# EAGLE board Motherboard_2 (EAGLE 9.2.0)
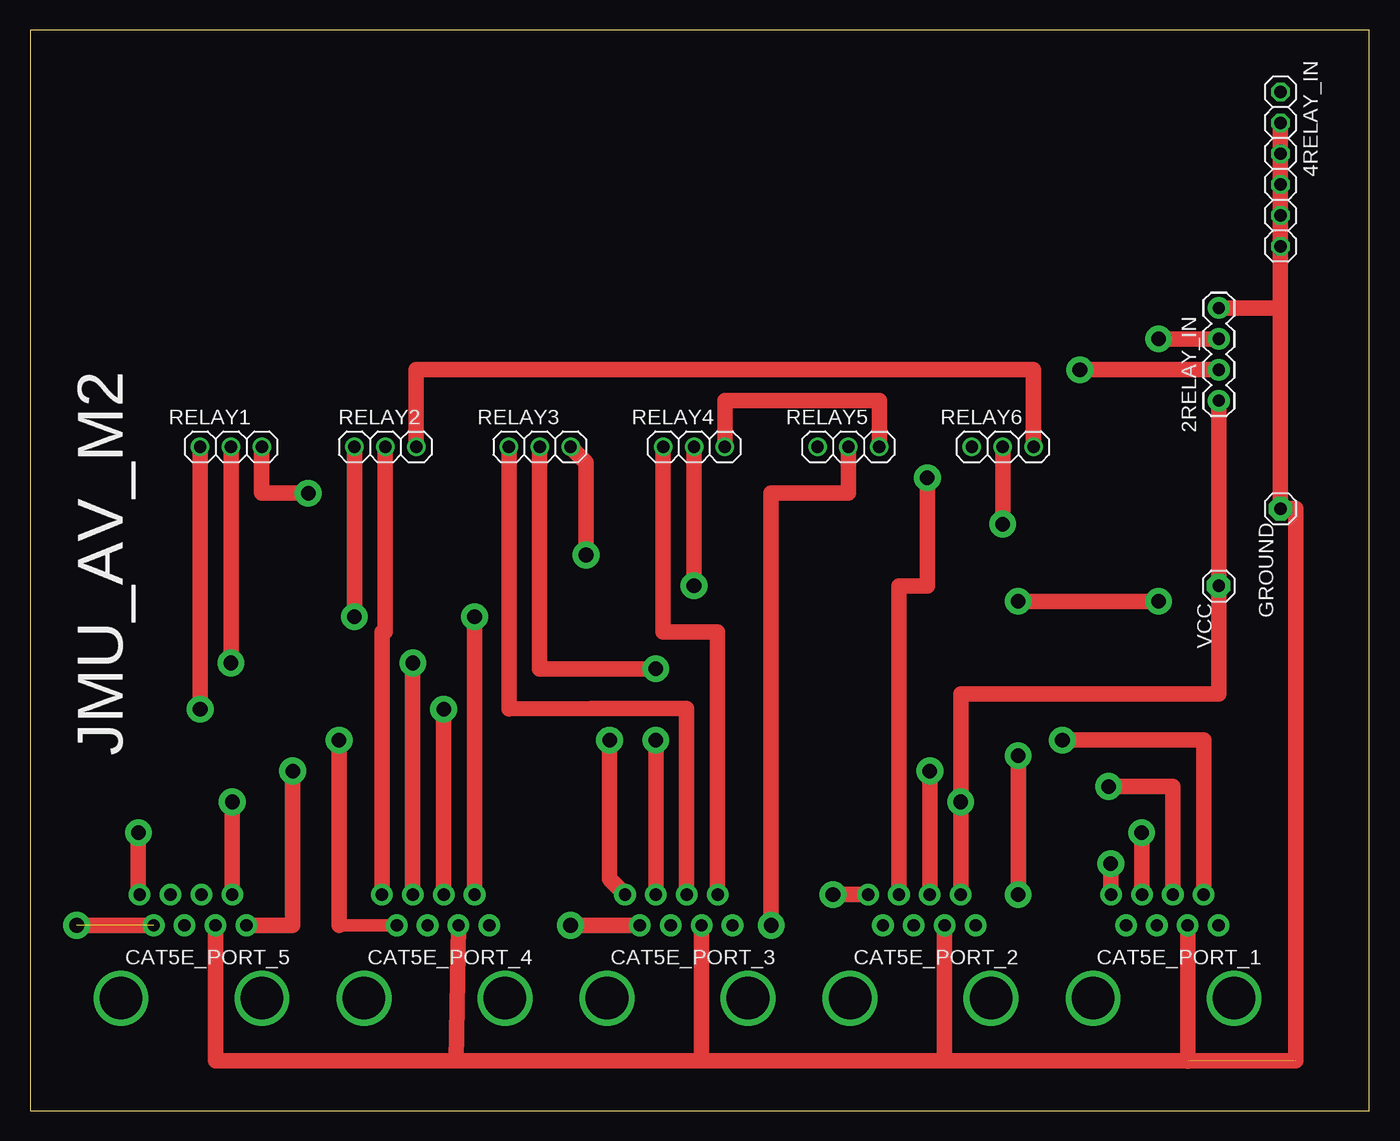
[diagram p0: board, top side]
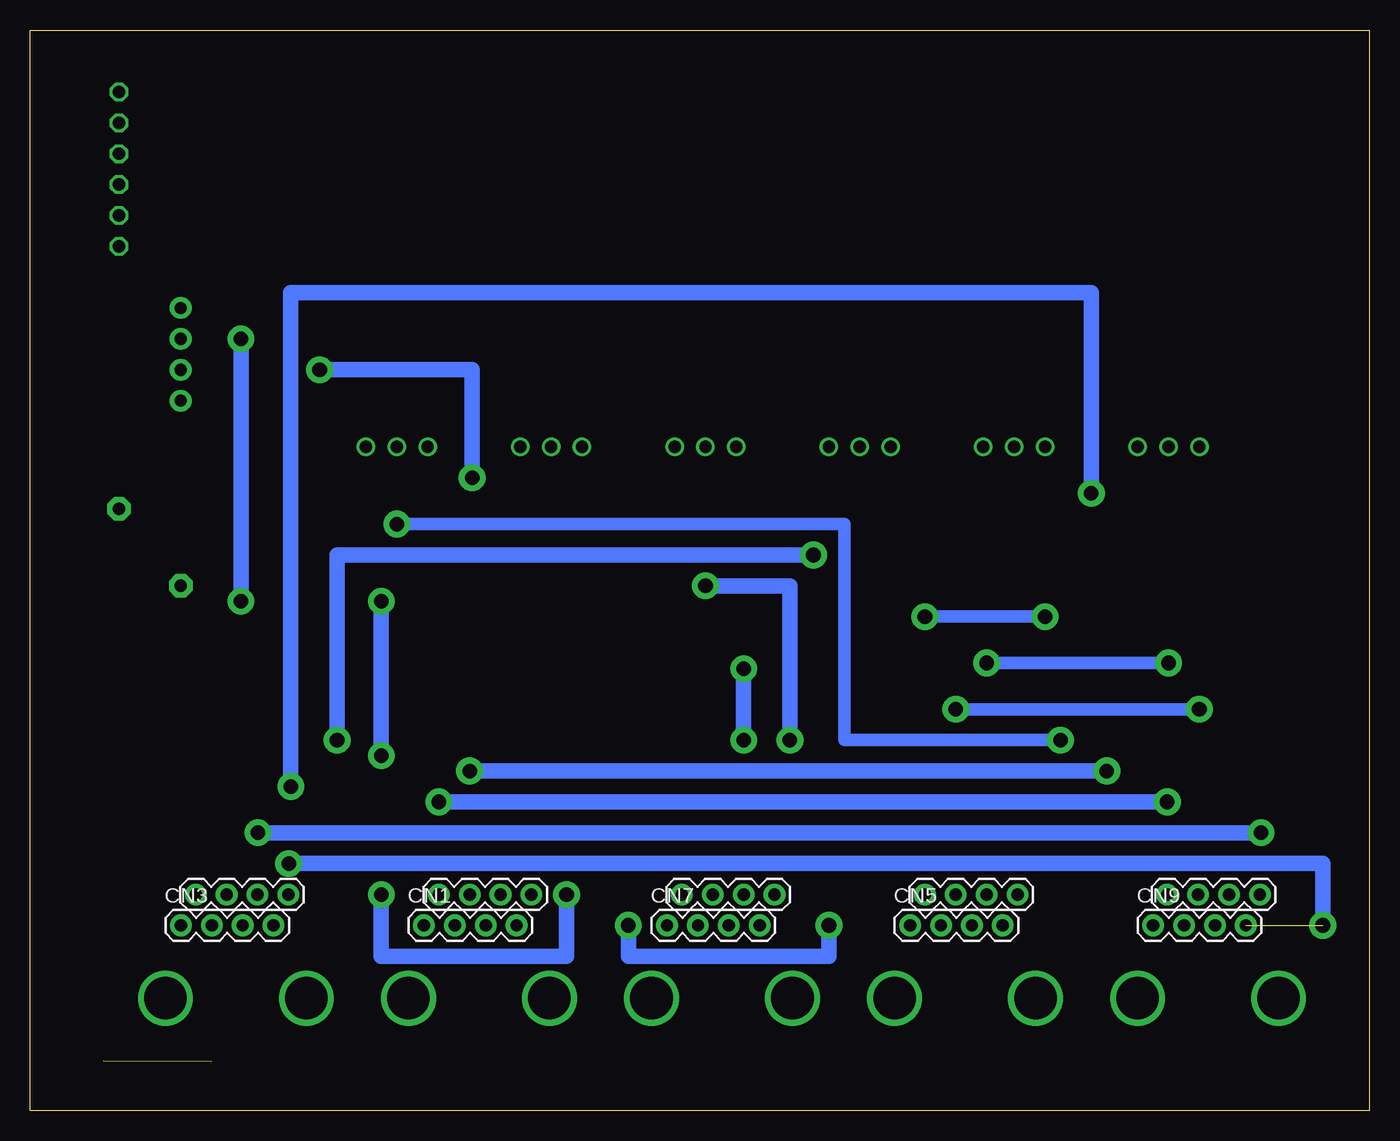
[diagram p1: board, bottom side, seen from below]

Size 110.16 x 88.89 mm. Coordinates in mm from the lower left corner, seen from the top.
Outline: 0,0 110.16,0 110.16,88.89 0,88.89 0,0
Copper layers (1*16): Top 0.035mm / dielectric 1.5mm / Bottom 0.035mm
Design rules "default": minimum track width 6mil, minimum drill 0.35mm, track to track 6mil, track to pad 6mil, pad to pad 6mil, via to via 6mil, smd to smd 6mil, copper to edge 40mil, drill to drill 6mil, minimum pad ring 10mil, minimum via ring 8mil, stop-mask expansion 4mil, vias tented up to drill 0mil, thermal gap 10mil
Net classes: 0 default: width 0.762 mm, drill 0.254 mm, clearance 0.025 mm

## Footprints (pad centres in the part's own frame; a part is rotated, then mirrored left to right if it is on the bottom)
1X04-BIG = drill 1.016 pad 1.778: 1 0,0; 2 2.54,0; 3 5.08,0; 4 7.62,0
1X06 = drill 1.016 octagon: 1 -6.35,0; 2 -3.81,0; 3 -1.27,0; 4 1.27,0; 5 3.81,0; 6 6.35,0
1X01 = drill 1.016 pad 1.93 octagon: 1 0,0
1X03 = drill 1.016: 1 -2.54,0; 2 0,0; 3 2.54,0

## Placement (x,y rotation side)
2RELAY_IN  1X4-BIG  [1X04-BIG]  97.79,58.42 90 top
4RELAY_IN  [1X06]  102.87,77.47 270 top
CAT5E_PORT_1  1X4-BIG  [1X04-BIG]  96.55,17.78 0 bottom
CAT5E_PORT_2  1X4-BIG  [1X04-BIG]  76.55,17.78 0 bottom
CAT5E_PORT_3  1X4-BIG  [1X04-BIG]  56.55,17.78 0 bottom
CAT5E_PORT_4  1X4-BIG  [1X04-BIG]  36.55,17.78 0 bottom
CAT5E_PORT_5  1X4-BIG  [1X04-BIG]  16.61,17.78 0 bottom
CN1  1X4-BIG  [1X04-BIG]  77.77,15.24 0 bottom
CN3  1X4-BIG  [1X04-BIG]  97.77,15.24 0 bottom
CN5  1X4-BIG  [1X04-BIG]  37.77,15.24 0 bottom
CN7  1X4-BIG  [1X04-BIG]  57.77,15.24 0 bottom
CN9  1X4-BIG  [1X04-BIG]  17.77,15.24 0 bottom
GROUND  [1X01]  102.87,49.53 90 top
RELAY1  [1X03]  16.51,54.61 0 top
RELAY2  [1X03]  29.21,54.61 0 top
RELAY3  [1X03]  41.91,54.61 0 top
RELAY4  [1X03]  54.61,54.61 0 top
RELAY5  [1X03]  67.31,54.61 0 top
RELAY6  [1X03]  80.01,54.61 0 top
VCC  [1X01]  97.79,43.18 90 top

## Library data of the parts
2RELAY_IN 4RELAY_IN CAT5E_PORT_1-CAT5E_PORT_5 CN1 CN3 CN5 CN7 CN9 GROUND RELAY1-RELAY6 VCC = adafruit

## Nets
N$11: CAT5E_PORT_4.1 RELAY2.1
N$12: CAT5E_PORT_4.2 RELAY1.1
N$13: CAT5E_PORT_4.3 RELAY1.2
N$14: CAT5E_PORT_4.4 RELAY2.2
N$15: CN5.4 RELAY6.2
N$16: 2RELAY_IN.3 CAT5E_PORT_2.4
N$17: CAT5E_PORT_3.1 RELAY4.1
N$18: CAT5E_PORT_3.2 RELAY3.1
N$19: CAT5E_PORT_3.4 RELAY4.2
N$20: RELAY2.3 RELAY6.3
N$21: RELAY4.3 RELAY5.3
N$22: CN7.4 RELAY5.2
N$23: CAT5E_PORT_1.1 RELAY3.3
N$24: CAT5E_PORT_3.3 RELAY3.2
N$25: CAT5E_PORT_1.2 RELAY1.3
N$26: CAT5E_PORT_1.3 CAT5E_PORT_5.4
N$27: CAT5E_PORT_1.4 CN9.4
N$28: CAT5E_PORT_2.2 CN9.1
N$29: 2RELAY_IN.1 CAT5E_PORT_2.1 CAT5E_PORT_5.1 VCC.1
N$30: 2RELAY_IN.4 4RELAY_IN.2 4RELAY_IN.3 4RELAY_IN.4 4RELAY_IN.5 4RELAY_IN.6 CN1.2 CN3.2 CN5.2 CN7.2 CN9.2 GROUND.1
N$31: 2RELAY_IN.2 CAT5E_PORT_2.3

## Tracks (layer width: path | path; a pad name or v marks a point on that pad's centre or on a via)
N$1  (via drill 3.5 pad 1.3)
  other vias: 67.45,9.24
N$2  (via drill 3.5 pad 1.3)
  other vias: 79.05,9.24
N$3  (via drill 3.5 pad 1.3)
  other vias: 87.45,9.24
N$4  (via drill 3.5 pad 1.3)
  other vias: 99.05,9.24
N$5  (via drill 3.5 pad 1.3)
  other vias: 27.45,9.24
N$6  (via drill 3.5 pad 1.3)
  other vias: 39.05,9.24
N$7  (via drill 3.5 pad 1.3)
  other vias: 47.45,9.24
N$8  (via drill 3.5 pad 1.3)
  other vias: 59.05,9.24
N$9  (via drill 3.5 pad 1.3)
  other vias: 7.45,9.24
N$10  (via drill 3.5 pad 1.3)
  other vias: 19.05,9.24
N$11  (via drill 1.2 pad 2.2)
  Top 1.27: RELAY2.1 v26.67,40.64 | CAT5E_PORT_4.1 v36.55,40.64
  Bottom 1.016: v36.55,40.64 v26.67,40.64
N$12  (via drill 1.2 pad 2.2)
  Top 1.27: RELAY1.1 v13.97,33.02 | CAT5E_PORT_4.2 v34.01,33.02
  Bottom 1.016: v34.01,33.02 v13.97,33.02
N$13  (via drill 1.2 pad 2.2)
  Top 1.27: RELAY1.2 v16.51,36.83 | CAT5E_PORT_4.3 v31.47,36.83
  Bottom 1.016: v31.47,36.83 v16.51,36.83
N$14
  Top 1.27: CAT5E_PORT_4.4 28.93,39.37 29.21,39.37 RELAY2.2
N$15  (via drill 1.2 pad 2.2)
  Top 1.016: CN5.4 25.4,15.24
  Top 1.27: RELAY6.2 v80.01,48.26 | 25.4,15.24 v25.4,30.48
  Bottom 1.016: v80.01,48.26 43.18,48.26 43.18,30.48 v25.4,30.48
N$16  (via drill 1.2 pad 2.2)
  Top 1.27: v81.28,29.21 v81.28,17.78 | v92.83,41.91 v81.28,41.91 | 2RELAY_IN.3 v92.83,63.5 | CAT5E_PORT_2.4 v66.04,17.78
  Bottom 1.27: v81.28,41.91 v81.28,29.21 | v92.83,63.5 v92.83,41.91 | v66.04,17.78 66.04,12.7 81.28,12.7 v81.28,17.78
N$17
  Top 1.27: RELAY4.1 52.07,39.37 56.55,39.37 CAT5E_PORT_3.1
N$18
  Top 1.27: RELAY3.1 39.37,33.05 46.19,33.08 54.01,33.08 CAT5E_PORT_3.2
N$19  (via drill 1.2 pad 2.2)
  Top 1.27: v47.66,30.48 47.66,19.05 CAT5E_PORT_3.4 | RELAY4.2 v54.61,43.18
  Bottom 1.27: v47.66,30.48 47.66,43.18 v54.61,43.18
N$20
  Top 1.27: RELAY6.3 82.55,60.96 31.75,60.96 RELAY2.3
N$21
  Top 1.27: RELAY4.3 57.15,58.42 69.85,58.42 RELAY5.3
N$22  (via drill 1.2 pad 2.2)
  Top 1.27: v60.96,15.24 60.96,50.8 67.31,50.8 RELAY5.2 | CN7.4 v44.45,15.24
  Bottom 1.27: v44.45,15.24 44.45,12.7 60.96,12.7 v60.96,15.24
N$23  (via drill 1.2 pad 2.2)
  Top 1.27: RELAY3.3 45.72,53.34 v45.72,45.72 | CAT5E_PORT_1.1 96.55,30.48 v84.92,30.48
  Bottom 1.27: v84.92,30.48 84.92,45.72 v45.72,45.72
N$24  (via drill 1.2 pad 2.2)
  Top 1.27: RELAY3.2 41.91,36.35 v51.47,36.35 | CAT5E_PORT_3.3 v51.47,30.48
  Bottom 1.27: v51.47,30.48 v51.47,36.35
N$25  (via drill 1.2 pad 2.2)
  Top 1.27: RELAY1.3 19.05,50.8 v22.86,50.8 | CAT5E_PORT_1.2 94.01,26.67 v88.73,26.67
  Bottom 1.27: v88.73,26.67 88.73,67.31 22.86,67.31 v22.86,50.8
N$26  (via drill 1.2 pad 2.2)
  Top 1.016: CAT5E_PORT_5.4 8.89,17.78 | CAT5E_PORT_1.3 91.44,17.78
  Top 1.27: 8.89,17.78 v8.89,22.86 | 91.44,17.78 v91.44,22.86
  Bottom 1.27: v91.44,22.86 v8.89,22.86
N$27  (via drill 1.2 pad 2.2)  (1 unrouted)
  Top 1.016: CAT5E_PORT_1.4 88.9,17.78
  Top 1.27: CN9.4 v3.81,15.24 | 88.9,17.78 v88.9,20.32
  Bottom 1.27: v3.81,15.24 3.81,20.32 v88.9,20.32
N$28  (via drill 1.2 pad 2.2)
  Top 1.27: CN9.1 21.59,15.24 v21.59,27.94 | CAT5E_PORT_2.2 v74.01,27.94
  Bottom 1.27: v74.01,27.94 v21.59,27.94
N$29  (via drill 1.2 pad 2.2)
  Top 1.27: 2RELAY_IN.1 VCC.1 97.79,34.29 76.55,34.29 v76.55,25.4 CAT5E_PORT_2.1 | CAT5E_PORT_5.1 v16.61,25.4
  Bottom 1.27: v76.55,25.4 v16.61,25.4
N$30  (1 unrouted)
  Top 1.016: CN9.2 arc-90 15.24,15.03 | 95.23,4.06 95.25,4.06
  Top 1.27: 75.23,4.08 104.14,4.08 104.14,49.53 GROUND.1 102.87,66.04 | 75.23,4.08 55.23,4.08 | 55.23,4.08 35.03,4.08 | 35.03,4.08 15.24,4.08 15.24,15.03 | 102.87,66.04 4RELAY_IN.6 4RELAY_IN.5 4RELAY_IN.4 4RELAY_IN.3 4RELAY_IN.2 | 102.87,66.04 2RELAY_IN.4 | CN5.2 35.03,4.08 | 55.23,4.08 CN7.2 | CN1.2 75.23,4.08 | CN3.2 95.23,4.06
N$31  (via drill 1.2 pad 2.2)
  Top 1.27: v73.81,52.07 73.81,43.18 71.47,43.18 CAT5E_PORT_2.3 | 2RELAY_IN.2 v86.36,60.96
  Bottom 1.016: v86.36,60.96 86.34,60.98
  Bottom 1.27: v73.81,52.07 73.81,60.98 86.34,60.98

## Text on the board
tPlace: JMU_AV_M2